# Altium PCB STM32F103-Breakout-Board.PcbDoc
Units mm, origin at the board's own origin, x right, y up, seen from the top; angles counter-clockwise.
Board outline 50 x 50 mm, 2 copper layers (Top Layer, Bottom Layer); 31 components, 22 nets, 131 pads, 175 vias.
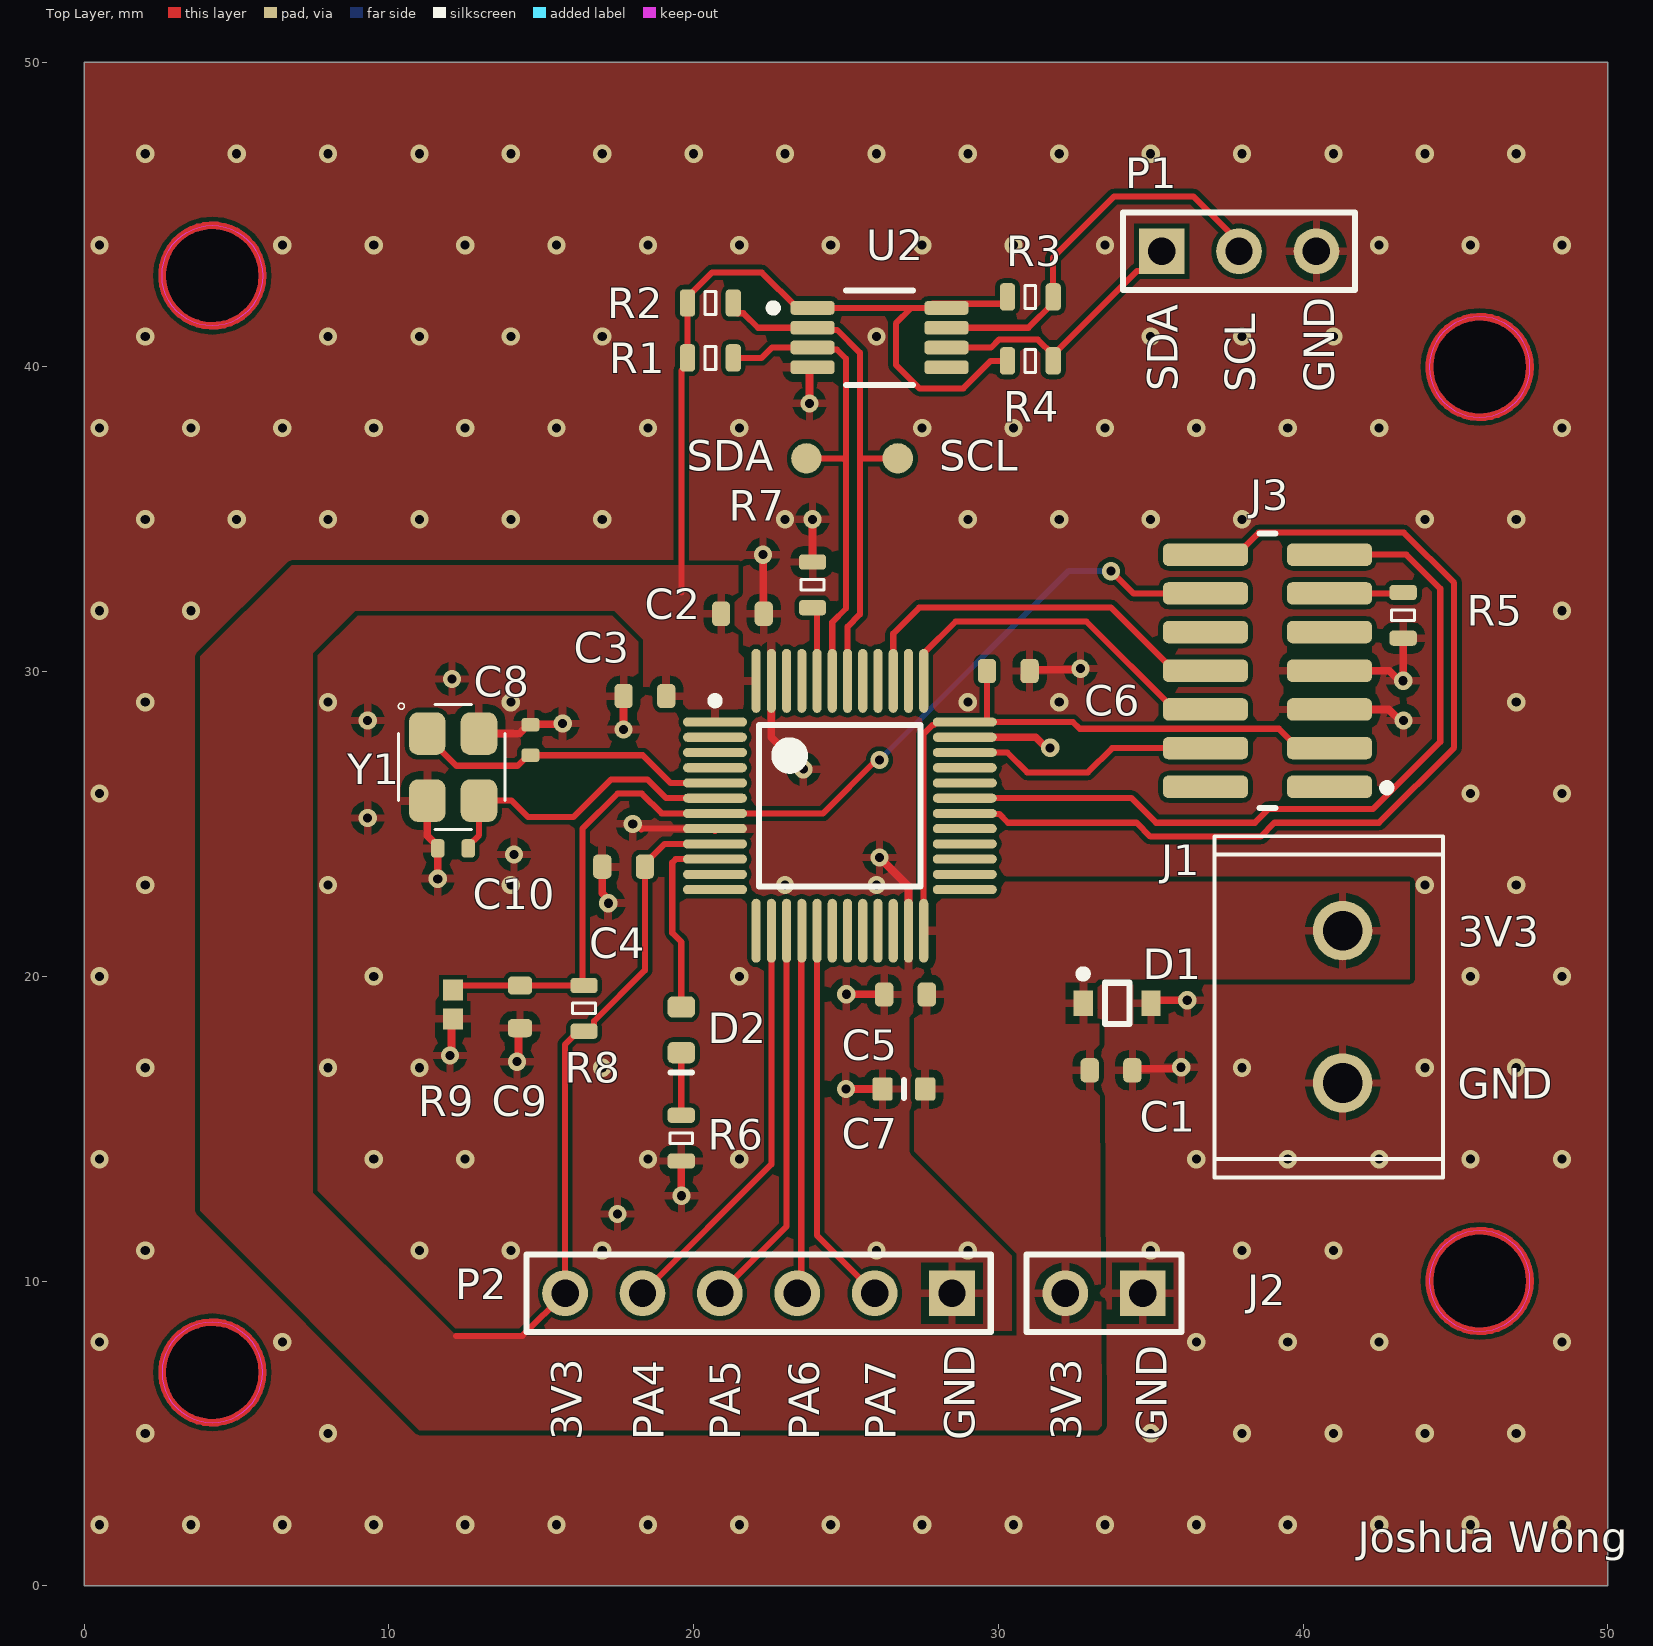
[diagram p0: Top Layer view]
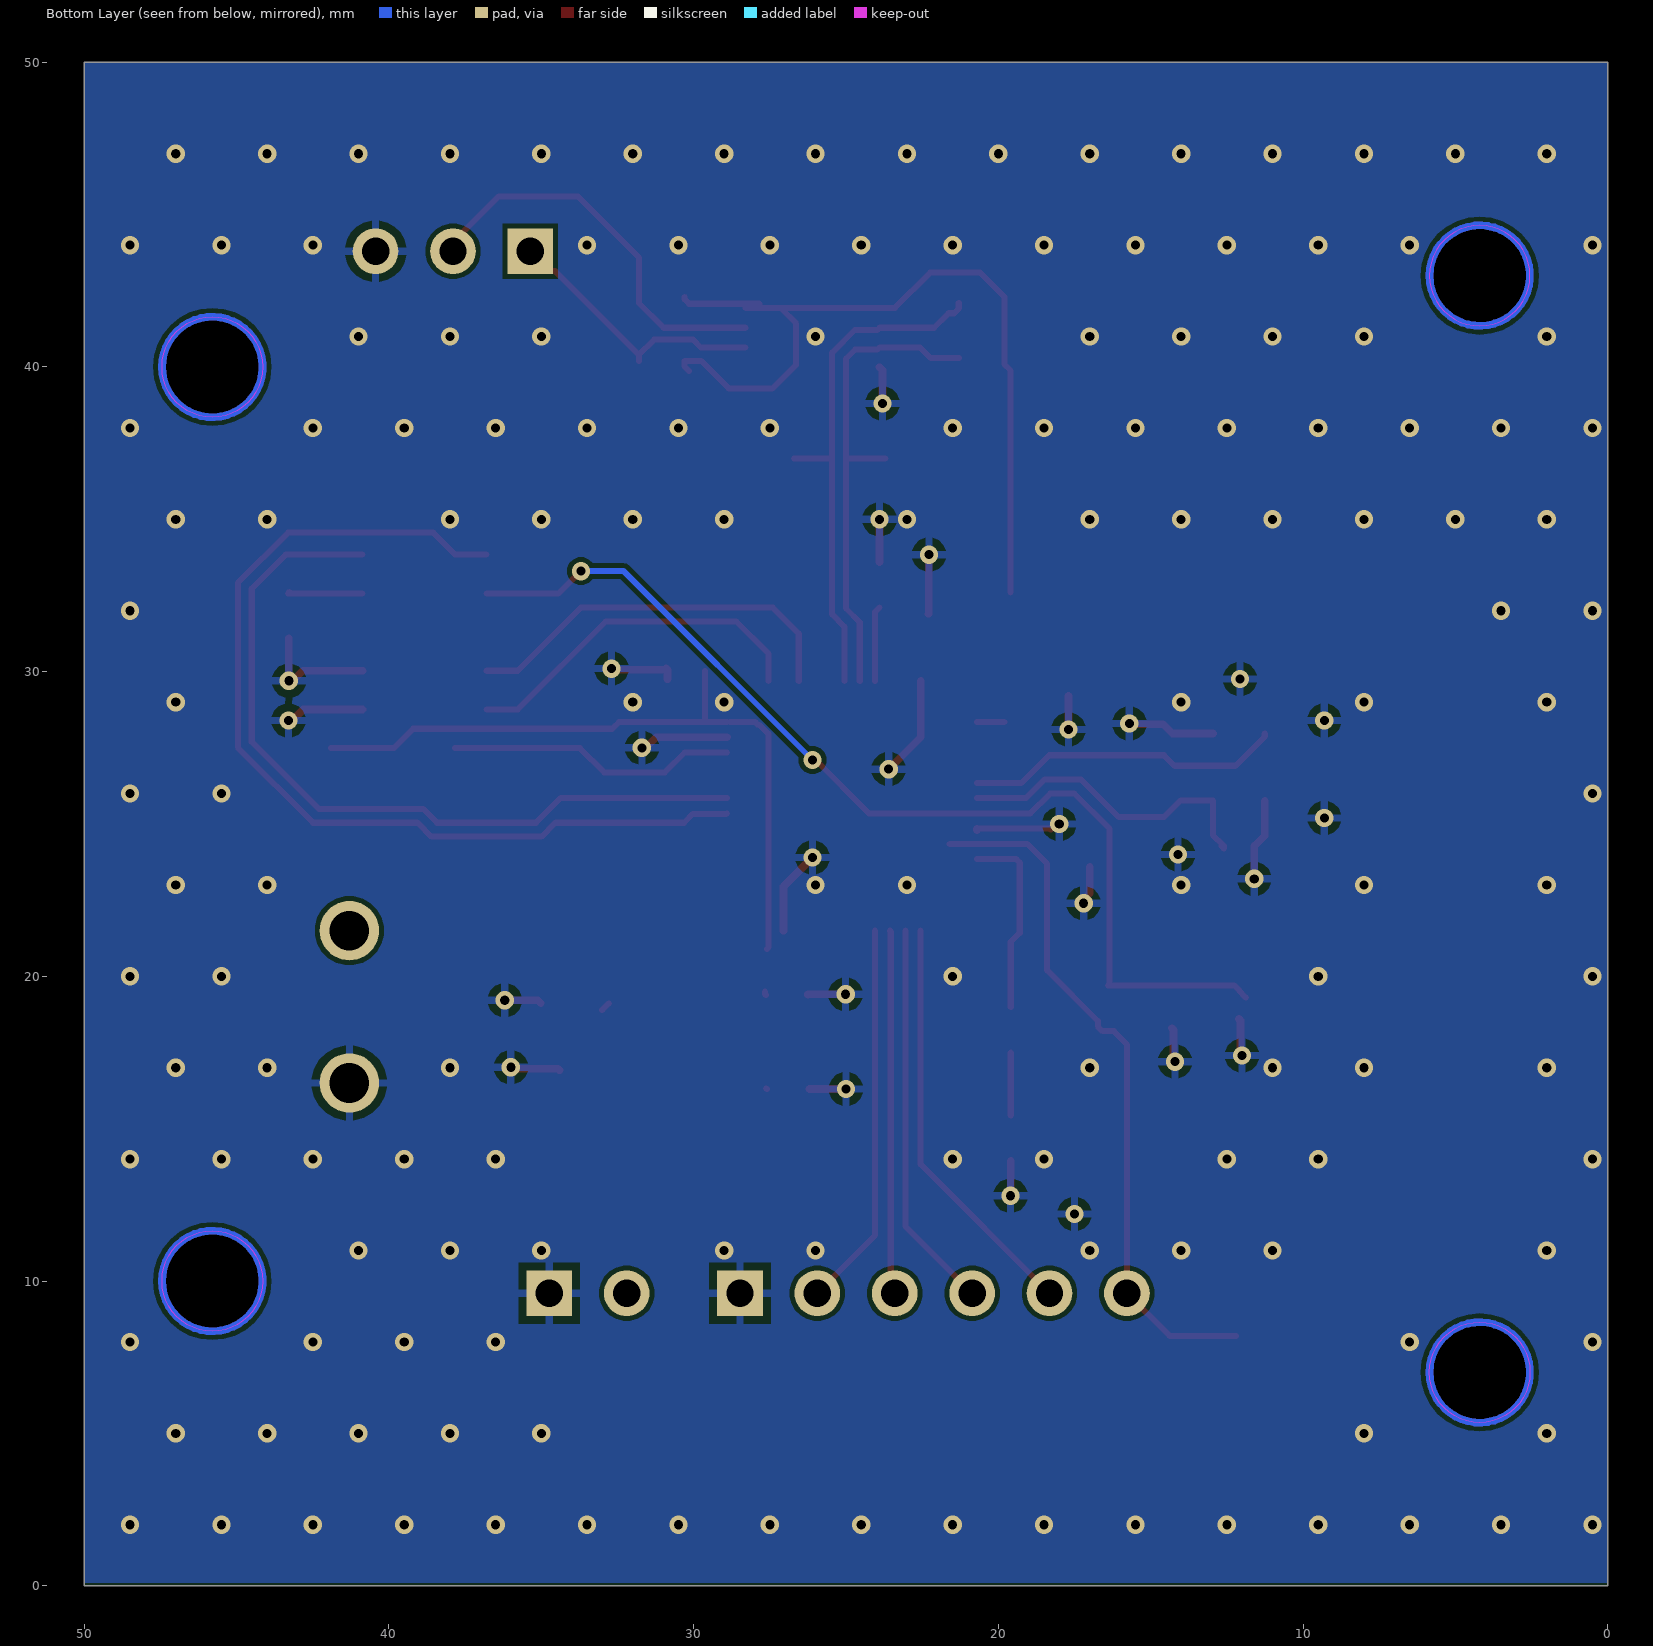
[diagram p1: Bottom Layer view, seen from below]
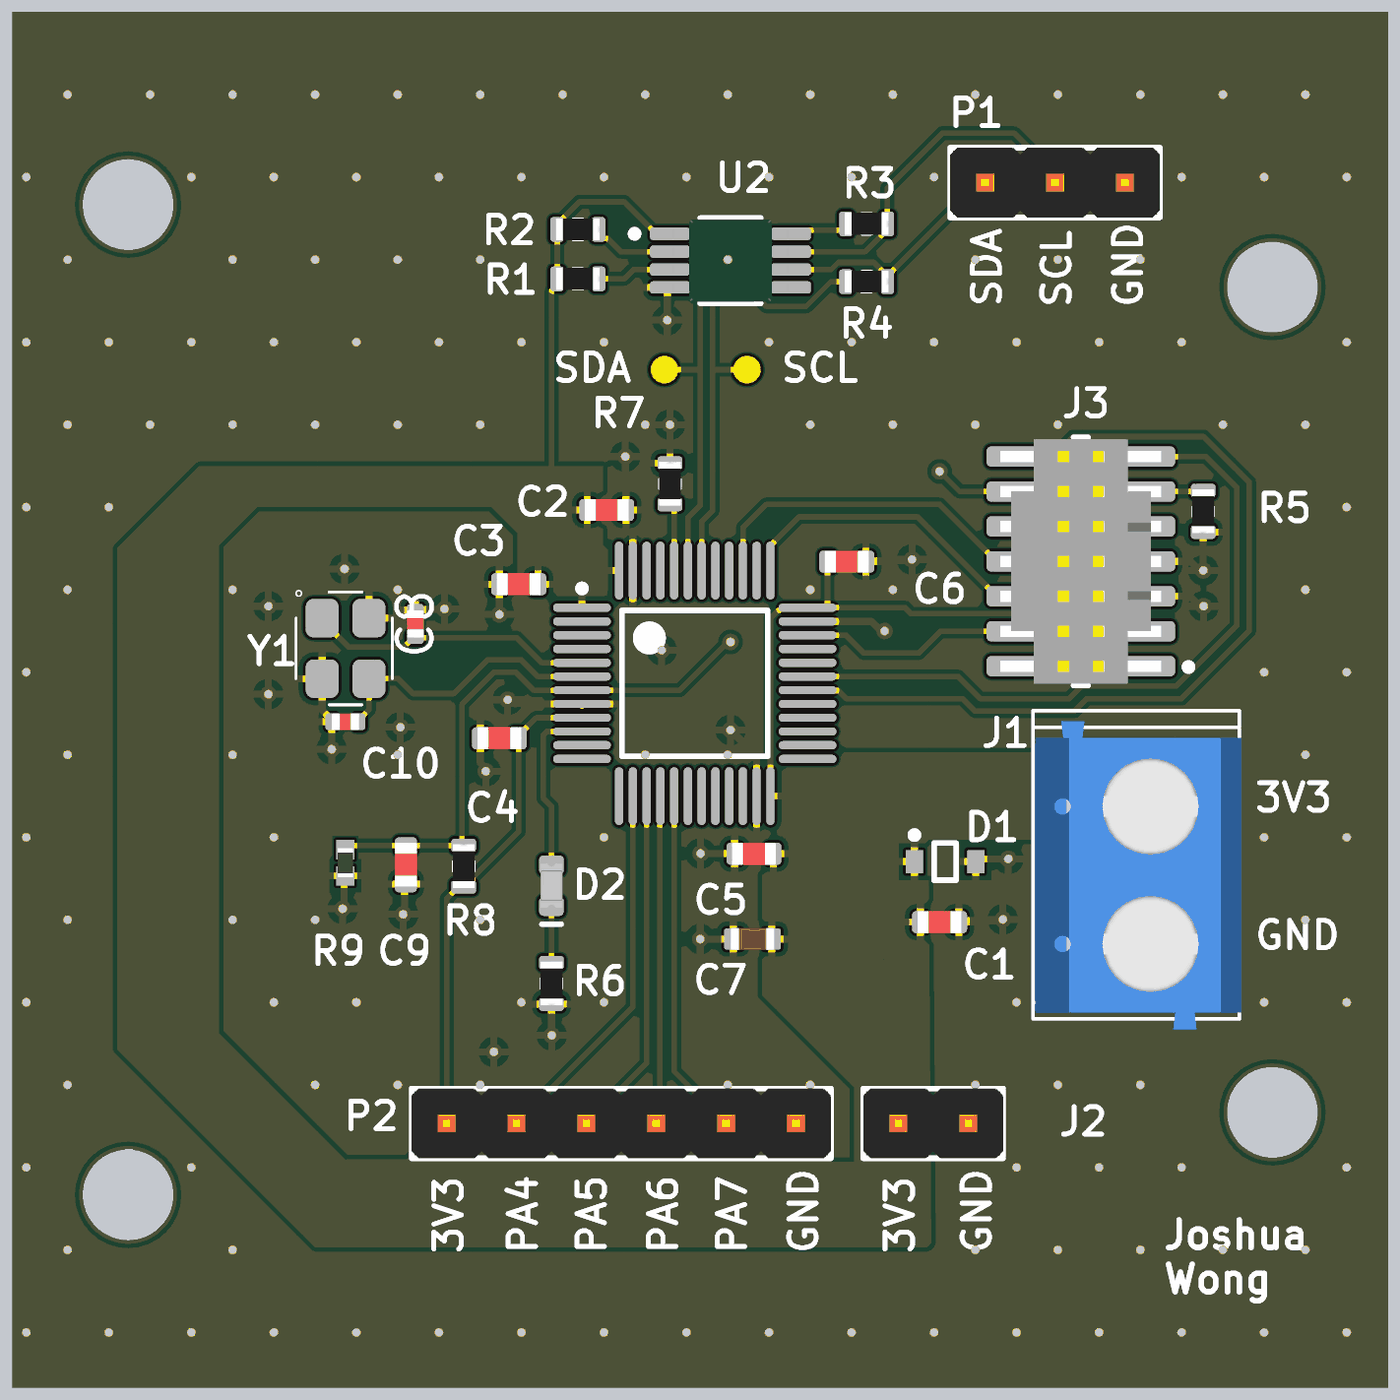
[diagram p2: 3D render of the assembled board from above, using the file's embedded part models]

## Layer stack, top to bottom
Top Solder: solder mask 0.0102, Solder Resist, Dk 3.5
Top Layer: signal copper 0.0356
Dielectric 1: dielectric 0.32, FR-4, Dk 4.8
Bottom Layer: signal copper 0.0356
Bottom Solder: solder mask 0.0102, Solder Resist, Dk 3.5

## Board outline
0,0 50,0 50,50 0,50
cut-out: 44.15,40 ccw(c45.8,40) 45.8,38.35 ccw(c45.8,40) 47.45,40 ccw(c45.8,40) 45.8,41.65 ccw(c45.8,40)
cut-out: 44.15,10 ccw(c45.8,10) 45.8,8.35 ccw(c45.8,10) 47.45,10 ccw(c45.8,10) 45.8,11.65 ccw(c45.8,10)
cut-out: 4.2,41.35 cw(c4.2,43) 2.55,43 cw(c4.2,43) 4.2,44.65 cw(c4.2,43) 5.85,43 cw(c4.2,43)
cut-out: 2.55,7 ccw(c4.2,7) 4.2,5.35 ccw(c4.2,7) 5.85,7 ccw(c4.2,7) 4.2,8.65 ccw(c4.2,7)

## Design rules (kind name [scope] priority, off if disabled: settings)
Clearance [All] p1: gap=0.15 ignorepadtopadclearanceinfootprint=FALSE
PolygonConnect [All] p1: connectstyle=Relief reliefconductorwidth=0.254 reliefentries=4 polygonreliefangle="90 Angle" airgapwidth=0.254
RoutingVias [All] p1: holewidth=0.711 width=1.27 viastyle="Through Hole" minholewidth=0.711 minwidth=1.27 maxholewidth=0.711 maxwidth=1.27
SolderMaskExpansion [All] p1: expansion=0.102 istentingtop=FALSE
SupplyNets "Schematic Supply Nets_1" [InNet('3V3')] p1: voltage=0.000
SupplyNets "Schematic Supply Nets" [InNet('GND')] p2: voltage=0.000
Width [All] p1: maxlimit=1.6 minlimit=0.2 preferedwidth=0.254
30 further rules are at their usual default settings.

## Components (designator, comment, footprint, x,y, rotation, side; value= is the part's Value field where it differs from the comment)
C1 "GCM188R71C105KA64J" CAP0603R 33.7,16.915 r180 top value=1µF
C2 "TMK107B7104KAHT" CAP0603R 21.6,31.9 r180 top value=100nF
C3 "TMK107B7104KAHT" CAP0603R 18.4,29.2 r0 top value=100nF
C4 "TMK107B7104KAHT" CAP0603R 17.7,23.6 r0 top value=100nF
C5 "TMK107B7104KAHT" CAP0603R 26.953,19.403 r0 top value=100nF
C6 "TMK107B7104KAHT" CAP0603R 30.327,30.02 r180 top value=100nF
C7 "Capacitor 4.7µF +/-20% 10V 0603" CAPC0603(1608)100_L 26.9,16.3 r0 top value=4.7µF
C8 "GJM1555C1H100JB01D" CAP0402R 14.645,27.756 r90 top value=10pF
C9 "TMK107B7104KAHT" CAP0603R 14.3,19 r90 top value=100nF
C10 "GJM1555C1H100JB01D" CAP0402R 12.1,24.2 r180 top value=10pF
D1 "SZMM3Z3V3T1G" ONSC-SOD-323-2-477-02_V 33.9,19.115 r0 top
D2 "SML-D12U1WT86" LED0603 19.593,18.243 r90 top
J1 "691102710002" CON2_SCREW_5.00MM_691102710002 41.3,19 r90 top
J2 "Header 2" HDR1X2 34.74,9.6 r180 top
J3 "FTSH-107-01-L-DV-K" FP-FTSH-107-01-L-DV-K-MFG 38.835,30.03 r90 top
P1 "Header 3" HDR1X3 35.36,43.8 r0 top
P2 "Header 6" HDR1X6 28.48,9.6 r180 top
R1 "CRCW06034K70FKEA" RES0603R 20.55,40.3 r180 top value=4.7k
R2 "CRCW06034K70FKEA" RES0603R 20.55,42.1 r180 top value=4.7k
R3 "CRCW06034K70FKEA" RES0603R 31.05,42.3 r180 top value=4.7k
R4 "CRCW06034K70FKEA" RES0603R 31.05,40.2 r180 top value=4.7k
R5 "ERJ-3GEYJ101V" RES0603R 43.286,31.85 r90 top value=100
R6 "CRCW06031K00FKTA" RES0603R 19.593,14.687 r90 top value=1k
R7 "ERA-3AEB103V" RES0603R 23.9,32.85 r270 top value=10k
R8 "ERA-3AEB103V" RES0603R 16.4,18.95 r270 top value=10k
R9 "Resistor 0R 0402 63 mW" RESC1005X40X25ML05T10 12.1,19.075 r90 top value=0
SCL "TPAD10R" TP10R 26.7,37 r90 top (schematic designator TP1)
SDA "TPAD10R" TP10R 23.7,37 r90 top (schematic designator TP2)
U1 "STM32F103C8T6" STM-LQFP48_M 24.8,25.597 r0 top
U2 "TCA9517DGKRQ1" FP-DGK0008A-MFG 26.099,40.964 r0 top
Y1 "X322516MLB4SI" X322516MLB4SI-Footprint-1 12.105,26.867 r270 top

## Footprints (in the part's own frame and the unit in brackets; to place one, negate y for a bottom-side part, rotate by r counter-clockwise, add the part's x,y. Pads: shape width x height; smd on the part's side, far side on the other; paste and mask are expansions set on the pad)
CAP0402R [mm] "Capacitor 0402 reflow soldering"
  rrect50% 0.45x0.6 smd: 1(-0.5,0) 2(0.5,0)
  body extent -0.5,-0.3 0.5,0.3, height 0.2
CAP0603R [mm] "capacitor 0603 reflow soldering"
  rrect50% 0.6x0.8 smd: 1(-0.7,0) 2(0.7,0)
  body extent -0.8,-0.4 0.8,0.4, height 0.3
CAPC0603(1608)100_L [mm] "Chip Capacitor, Body 1.6x0.8mm, Height 1.0mm, IPC High Density"
  rrect25% 0.66x0.76 smd: 1(-0.7,0) 2(0.7,0)
  silkscreen extent 0,-0.3 0,0.3, body extent -0.8,-0.4 0.8,0.4, height 0.95
CON2_SCREW_5.00MM_691102710002 [mm] "2-Pos Screw terminal 5mm pitch"
  round 1.95 hole 1.3: 1(-2.5,0) 2(2.5,0)
  silkscreen extent -5.6,-3.3 5.6,4.2, body extent -5.98,-3.37 5.22,4.13, height 10.03
FP-DGK0008A-MFG [mm]
  rrect50% 1.45x0.45 smd: 1(-2.2,0.975) 2(-2.2,0.325) 3(-2.2,-0.325) 4(-2.2,-0.975) 5(2.2,-0.975) 6(2.2,-0.325) 7(2.2,0.325) 8(2.2,0.975)
  silkscreen extent -3.61,-1.55 1.1,1.55, body extent -3.03,-1.8 3.03,1.8, height 0.25
FP-FTSH-107-01-L-DV-K-MFG [mm]
  rrect50% 0.74x2.79 smd: 1(-3.81,-2.035) 2(-3.81,2.035) 3(-2.54,-2.035) 4(-2.54,2.035) 5(-1.27,-2.035) 6(-1.27,2.035) 7(0,-2.035) 8(0,2.035) 9(1.27,-2.035) 10(1.27,2.035) 11(2.54,-2.035) 12(2.54,2.035) 13(3.81,-2.035) 14(3.81,2.035)
  silkscreen extent -4.51,-4.04 4.51,0.27, body extent -4.61,-3.53 4.61,3.53, height 0.25
HDR1X2 [mm] "Connector; Header; 2 Position"
  rect 1.5x1.5 hole 0.9: 1(0,0)
  round 1.5 hole 0.9: 2(2.54,0)
  silkscreen extent -1.27,-1.27 3.81,1.27, body extent -1.27,-1.27 3.81,1.27, height 8.89
HDR1X3 [mm] "Connector; Header; 3 Position"
  rect 1.5x1.5 hole 0.9: 1(0,0)
  round 1.5 hole 0.9: 2(2.54,0) 3(5.08,0)
  silkscreen extent -1.27,-1.27 6.35,1.27, body extent -1.27,-1.27 6.35,1.27, height 8.89
HDR1X6 [mm] "Connector; Header; 6 Position"
  rect 1.5x1.5 hole 0.9: 1(0,0)
  round 1.5 hole 0.9: 2(2.54,0) 3(5.08,0) 4(7.62,0) 5(10.16,0) 6(12.7,0)
  silkscreen extent -1.27,-1.27 13.97,1.27, body extent -1.27,-1.27 13.97,1.27, height 8.89
LED0603 [mm] "0603 LED footprint, thick line on the cathode"
  rrect50% 0.7x0.9 smd: 1(-0.75,0) 2(0.75,0)
  silkscreen extent -1.4,-0.35 -1.4,0.35, body extent -0.8,-0.4 0.8,0.4, height 0.34
ONSC-SOD-323-2-477-02_V [mm] "SOD, 2-Leads, Body 1.7x1.25mm"
  rect 0.63x0.83 smd: 1(-1.115,0) 2(1.115,0)
  silkscreen extent -1.24,-0.67 0.4,1.09, body extent -0.85,-0.63 0.85,0.63, height 1.06
RES0603R [mm] "resistor 0603 reflow soldering"
  rrect50% 0.5x0.9 smd: 1(-0.75,0) 2(0.75,0)
  silkscreen extent -0.18,-0.38 0.18,0.38, body extent -0.8,-0.4 0.8,0.4, height 0.45
RESC1005X40X25ML05T10 [mm] "Chip Resistor, 2-Leads, Body 1.05x0.55mm, IPC Low Density"
  rect 0.7x0.65 smd: 1(-0.475,0) 2(0.475,0)
  body extent -0.53,-0.28 0.53,0.28, height 0.4
STM-LQFP48_M [mm] "QFP, 48-Leads, Body 7x7mm, Pitch 0.5mm, IPC Low Density"
  oval 2.1x0.3 smd: 1(-4.1,2.75) 2(-4.1,2.25) 3(-4.1,1.75) 4(-4.1,1.25) 5(-4.1,0.75) 6(-4.1,0.25) 7(-4.1,-0.25) 8(-4.1,-0.75) 9(-4.1,-1.25) 10(-4.1,-1.75) 11(-4.1,-2.25) 12(-4.1,-2.75) 25(4.1,-2.75) 26(4.1,-2.25) 27(4.1,-1.75) 28(4.1,-1.25) 29(4.1,-0.75) 30(4.1,-0.25) 31(4.1,0.25) 32(4.1,0.75) 33(4.1,1.25) 34(4.1,1.75) 35(4.1,2.25) 36(4.1,2.75)
  oval 0.3x2.1 smd: 13(-2.75,-4.1) 14(-2.25,-4.1) 15(-1.75,-4.1) 16(-1.25,-4.1) 17(-0.75,-4.1) 18(-0.25,-4.1) 19(0.25,-4.1) 20(0.75,-4.1) 21(1.25,-4.1) 22(1.75,-4.1) 23(2.25,-4.1) 24(2.75,-4.1) 37(2.75,4.1) 38(2.25,4.1) 39(1.75,4.1) 40(1.25,4.1) 41(0.75,4.1) 42(0.25,4.1) 43(-0.25,4.1) 44(-0.75,4.1) 45(-1.25,4.1) 46(-1.75,4.1) 47(-2.25,4.1) 48(-2.75,4.1)
  silkscreen extent -4.22,-2.65 2.65,3.57, body extent -3.5,-3.5 3.5,3.5, height 1.6
TP10R [mm] "Testpoint, round, d=1.0mm"
  round 1 smd paste-1: 1(0,0)
X322516MLB4SI-Footprint-1 [mm]
  rrect50% 1.4x1.2 smd: 1(-1.1,-0.85) 2(1.1,-0.85) 3(1.1,0.85) 4(-1.1,0.85)
  silkscreen extent -2.1,-1.8 2.05,1.7, body extent -1.62,-1.25 1.63,1.25, height 0.7

## Part data
C1: library part CMP-024-000687-8, "CAP CER 1UF 16V X7R 0603", Case/Package="0603 (1608 Metric)", Manufacturer="Murata Electronics", Max Operating Temperature=125°C, Min Operating Temperature=-55°C, Rating=AEC-Q200, Supplier Part Number 1=490-12657-1-ND, Temperature Coefficient=X7R, Tolerance=10%, Voltage Rating=16V, ComponentLink1Description=Datasheet, ComponentLink1URL=https://www.murata.com/~/media/webrenewal/support/library/catalog/products/capacitor/mlcc/c03e.ashx?la=en-us, PN=GCM188R71C105KA64J, Supplier 1=Digi-Key
C2 C3 C4 C5 C6 C9: library part CMP-024-001300-8, "CAP CER 0.1UF 25V X7R 0603", Case/Package="0603 (1608 Metric)", Manufacturer="Taiyo Yuden", Max Operating Temperature=125°C, Min Operating Temperature=-55°C, Rating=AEC-Q200, Supplier Part Number 1=587-3468-1-ND, Temperature Coefficient=X7R, Tolerance=10%, Voltage Rating=25V, ComponentLink1Description=Datasheet, ComponentLink1URL=https://www.yuden.co.jp/productdata/catalog/mlcc_all_hq_e.pdf, PN=TMK107B7104KAHT, Supplier 1=Digi-Key
C7: library part CMP-001-00076-9, "Chip Capacitor, 4.7µF +/-20%, 10V, 0603, Thickness 1 mm", Case/Package="0603 (1608 Metric)", Max Operating Temperature=85°C, Min Operating Temperature=-55°C, Tolerance=10%, Voltage Rating=10V
C8 C10: library part CMP-024-000904-8, "CAP CER 10PF 50V C0G/NP0 0402", Case/Package="0402 (1005 Metric)", Manufacturer="Murata Electronics", Max Operating Temperature=125°C, Min Operating Temperature=-55°C, Rating=-, Supplier Part Number 1=490-3113-1-ND, Temperature Coefficient="C0G, NP0", Tolerance=5%, Voltage Rating=50V, ComponentLink1Description=Datasheet, ComponentLink1URL=https://search.murata.co.jp/Ceramy/image/img/A01X/G101/ENG/GJM1555C1H100JB01-01.pdf, PN=GJM1555C1H100JB01D, Supplier 1=Digi-Key
D1: library part CMP-004-00015-1, "Zener Diode, 3.3V V(Z), 6%, 0.3W, Silicon, Unidirectional", Max Operating Temperature=150°C, RoHS Compliant=Yes
D2: library part CMP-029-000028-3, "LED RED DIFFUSED 1608 SMD", Color=Red, Current - Average=20mA, Manufacturer="Rohm Semiconductor", Package="0603 (1608 Metric)", Supplier Part Number 1=SML-D12U1WT86CT-ND, Voltage - Forward Max=2.2V, ComponentLink1Description=Datasheet, ComponentLink1URL=https://d1d2qsbl8m0m72.cloudfront.net/en/products/databook/datasheet/opto/led/chip_mono/sml-d12x1-e.pdf, PN=SML-D12U1WT86, Supplier 1=Digi-Key, Type=LED
J1: library part CMP-027-000000-1, "2 Position Wire to Board Terminal Block Horizontal with Board 0.197\" (5.00mm) Through Hole", Manufacturer="Würth Elektronik", Supplier Part Number 1=732-2028-ND, ComponentLink1Description=Datasheet, ComponentLink1URL=https://www.we-online.de/katalog/datasheet/6911027100xx.pdf, Connector Type="Screw Terminal", Contact Type=Wire, Number of Positions=2, Number of Rows=1, Pitch - Mating="0.197\" (5.00mm)", PN=691102710002, Series="WR-TBL Series 102", Supplier 1=Digi-Key
J2: library part CMP-083-000070-4, "Header, 2-Pin", Component Type=Standard, Design Item ID="Header 2", LatestRevisionDate=17-Jul-2002, LatestRevisionNote="Re-released for DXP Platform.", Pin Count=2, Publisher="Altium Limited", Source="Miscellaneous Connectors.SchLib"
J3: library part CMP-002-00034-3, "Conn Unshrouded Header HDR 14 POS 1.27mm Solder ST Top Entry SMD TIGER CLAW™ Tube", Current Rating=3.4A, Max Operating Temperature=125°C, Min Operating Temperature=-55°C, Contact Material=Bronze, Gender=Male, Number of Contacts=14, Number of Rows=2, Pitch=1.27mm
P1: library part CMP-083-000090-3, "Header, 3-Pin", Component Type=Standard, Design Item ID="Header 3", LatestRevisionDate=17-Jul-2002, LatestRevisionNote="Re-released for DXP Platform.", Pin Count=3, Publisher="Altium Limited", Source="Miscellaneous Connectors.SchLib"
P2: library part CMP-083-000107-2, "Header, 6-Pin", Component Type=Standard, Design Item ID="Header 6", LatestRevisionDate=17-Jul-2002, LatestRevisionNote="Re-released for DXP Platform.", Pin Count=6, Publisher="Altium Limited", Source="Miscellaneous Connectors.SchLib"
R1 R2 R3 R4: library part CMP-054-001314-6, "RES SMD 4.7K OHM 1% 1/10W 0603", Case/Package="0603 (1608 Metric)", Manufacturer="Vishay Dale", Max Operating Temperature=155°C, Min Operating Temperature=-55°C, Power=100mW, Rating=AEC-Q200, Supplier Part Number 1=541-4.70KHCT-ND, Tolerance=1%, ComponentLink1Description=Datasheet, ComponentLink1URL=https://www.vishay.com/docs/20035/dcrcwe3.pdf, Composition="Thick Film", PN=CRCW06034K70FKEA, Supplier 1=Digi-Key
R5: library part CMP-054-002817-6, "RES SMD 100 OHM 5% 1/10W 0603", Case/Package="0603 (1608 Metric)", Manufacturer=Panasonic, Max Operating Temperature=155°C, Min Operating Temperature=-55°C, Power=100mW, Rating=AEC-Q200, Supplier Part Number 1=P100GCT-ND, Tolerance=5%, ComponentLink1Description=Datasheet, ComponentLink1URL=http://industrial.panasonic.com/www-cgi/jvcr13pz.cgi?E+PZ+3+AOA0001+ERJ3GEYJ101V+7+WW, Composition="Thick Film", PN=ERJ-3GEYJ101V, Supplier 1=Digi-Key
R6: library part CMP-054-000907-6, "RES SMD 1K OHM 1% 1/10W 0603", Case/Package="0603 (1608 Metric)", Manufacturer="Vishay Dale", Max Operating Temperature=155°C, Min Operating Temperature=-55°C, Power=100mW, Rating=AEC-Q200, Supplier Part Number 1=541-2987-1-ND, Tolerance=1%, ComponentLink1Description=Datasheet, ComponentLink1URL=https://www.vishay.com/docs/20008/dcrcw.pdf, Composition="Thick Film", PN=CRCW06031K00FKTA, Supplier 1=Digi-Key
R7 R8: library part CMP-054-002375-6, "RES SMD 10K OHM 0.1% 1/10W 0603", Case/Package="0603 (1608 Metric)", Manufacturer=Panasonic, Max Operating Temperature=155°C, Min Operating Temperature=-55°C, Power=100mW, Rating=AEC-Q200, Supplier Part Number 1=P10KDBCT-ND, Tolerance=0.1%, ComponentLink1Description=Datasheet, ComponentLink1URL=https://industrial.panasonic.com/cdbs/www-data/pdf/RDM0000/AOA0000C307.pdf, Composition="Thin Film", PN=ERA-3AEB103V, Supplier 1=Digi-Key
R9: library part CMP-009-00004-5, "Chip Resistor, 0 Ohm, 0.063 W, -55 to 155 degC, 0402 (1005 Metric)", Case/Package=0402, Max Operating Temperature=155°C, Min Operating Temperature=-55°C, Power=63mW, Voltage Rating=50V, Mounting Technology=SM, Pins=2, RoHS Compliant=True
SCL SDA: library part CMP-00028-00000-4, "1mm round", Pins=1
U1: library part CMP-00007-1, "RISC Microcontroller, 32-Bit, FLASH, STM32 CPU, 72MHz, CMOS, PQFP48", Case/Package=LFQFP, Clock Frequency=16MHz, Max Operating Temperature=105°C, Max Supply Current=50mA, Max Supply Voltage=3.6V, Min Operating Temperature=-40°C, Min Supply Voltage=2V, Nominal Supply Voltage=3.3V, Package Body Material=Plastic, Package Equivalence Code=QFP48,.35SQ,20, Package Shape=Square, Peak Reflow Temperature (Cel)=260°C, Power Supplies=2.5/3.3, Temperature Grade=INDUSTRIAL, Time @ Peak Reflow Temperature-Max (s)=30s, Height - Seated (Max)=1.6mm, Interface=I2C,SPI,USB,CAN,USART, JESD-30 Code=S-PQFP-G48, JESD-609 Code=e4, Length=7mm, Moisture Sensitivity Level=2, Number of I/O Lines=37, Peripherals=POR,DMA, Pins=48, Qualification Status="Not Qualified", Reach SVHC Compliant=Yes, RoHS Compliant=Yes, Surface Mount=Yes, Technology=CMOS, Terminal Finish=Nickel, Terminal Form="Gull Wing", Terminal Pitch=0.5mm, Terminal Position=QUAD, Width=7mm
U2: library part CMP-015-00008-5, "Voltage Level Translator Bidirectional 1 Circuit 2 Channel 8-VSSOP", Case/Package=VSSOP, Frequency=400kHz, Max Operating Temperature=125°C, Min Operating Temperature=-40°C, Channel Type=Bidirectional
Y1: library part CMP-003-00003-2, "16MHz Surface Mount Crystal 9pF ±10ppm ±20ppm SMD3225-4P Crystals ROHS", Frequency=16MHz

## Via types
v1: diameter 0.6, hole 0.3, Top Layer to Bottom Layer, tented both sides, 175 vias

## Nets (pads, with @x,y where several pads share a name; then routed paths per layer and width w, separated by ;. In a path a pad name is that pad's centre, name@x,y a point inside that pad or via, vN(x,y) a via of type N, cw(c..) or ccw(c..) an arc to the next point about the centre after c; other vN are vias at no path point)
3V3: C1.2 C2.2 C3.2 C4.2 C5.2 C6.2 C7.2 D1.1 J1.2 J2.2 J3.3 P2.6 R1.2 R2.2 R3.2 R4.2 R8.2 U1.1 U1.9 U1.24 U1.36 U1.48 U2.1 U2.8 | length 76.5
  Top Layer w0.2: 12.2,8.2 14.38,8.2 P2.6 ; P2.6@15.7,9.52 P2.6 ; 19.6,32.6 19.6,39.886 19.8,40.086 R1.2 R2.2 19.8,42.3 20.6,43.1 22.238,43.1 23.399,41.939 U2.1 U2.8 ; U1.1@19.8,28.347 U1.1 ; U1.9@21.6,24.347 U1.9 19.047,24.347 18.4,23.7 C4.2 18.4,20.2 16.735,18.535 16.735,18.348 16.586,18.2 R8.2 16.211,18.2 15.78,17.769 P2.6 ; 27.134,41.929 26.636,41.431 26.636,40.07 27.406,39.3 28.848,39.3 29.748,40.2 R4.2 30.3,40.014 R4.2@30.152,39.865 ; U1.24@27.596,20.9 27.55,20.946 U1.24 27.55,27.963 27.834,28.247 27.873,28.247 27.973,28.347 U1.36@28.8,28.347 ; C7.2 C7.2@27.62,16.32 ; C5.2@27.633,19.383 C5.2 C5.2@27.653,19.503 ; U2.8@27.847,42.075 30.152,42.075 30.3,42.223 R3.2 ; U1.36 U1.36@29.581,28.347 ; C6.2 29.627,28.393 U1.36@29.581,28.347 ; D1.1 D1.1@33,18.9 ; J3.3@41.895,27.49 J3.3 39.845,27.49 39.21,28.125 32.673,28.125 32.451,28.347 U1.36@29.581,28.347
GND: C1.1 C2.1 C3.1 C4.1 C5.1 C6.1 C7.1 C8.2 C9.1 C10.2 D1.2 J1.1 J2.1 J3.5 J3.7 P1.3 P2.1 R5.1 R6.1 R7.1 R9.1 U1.8 U1.23 U1.35 U1.47 U2.4 Y1.2 Y1.4 | length 42
  Top Layer w0.2: 18.277,24.847 U1.8
  Top Layer w0.254: Y1.2 11.255,24.62 11.6,24.275 C10.2 v1(11.6,23.2) ; v1(12,17.4) 12.05,17.45 12.05,18.55 R9.1 ; Y1.4 14.281,27.967 14.592,28.278 15.678,28.278 v1(15.7,28.3) ; v1(14.2,17.2) 14.25,17.25 14.25,18.25 C9.1 ; C4.1 17,22.724 17.2,22.524 v1(17.2,22.4) ; v1(17.7,28.1) C3.1 ; v1(18,25) 18.124,25 18.277,24.847 ; R6.1 19.597,13.934 19.597,12.803 v1(19.6,12.8) ; U1.8@20.7,24.8 U1.8 ; v1(22.276,33.841) 22.288,33.829 22.288,31.912 C2.1 ; U1.47 22.55,27.85 v1(23.6,26.8) ; v1(23.8,38.8) 23.8,39.891 U2.4@23.898,39.989 ; R7.1 v1(23.9,35) ; v1(25,16.3) C7.1 ; v1(25.013,19.41) 26.253,19.41 C5.1 ; v1(26.1,23.9) 27.05,22.95 U1.23 ; U1.35 31.229,27.847 31.576,27.5 v1(31.7,27.5) ; C6.1@30.862,29.755 30.862,30.062 30.9,30.1 30.94,30.06 32.66,30.06 v1(32.7,30.1) ; C1.1 34.45,16.965 35.95,16.965 v1(36,17.015) ; D1.2 35.115,19.215 v1(36.2,19.215) ; J3.5 42.816,28.76 43.176,28.4 v1(43.3,28.4) ; J3.7 42.833,30.03 43.163,29.7 v1(43.286,29.7) R5.1
  other v1: 0.5,2 3.5,2 6.5,2 9.5,2 12.5,2 15.5,2 18.5,2 21.5,2 24.5,2 27.5,2 30.5,2 33.5,2 36.5,2 39.5,2 42.5,2 45.5,2 48.5,2 2,5 8,5 35,5 38,5 41,5 44,5 47,5 0.5,8 6.5,8 36.5,8 39.5,8 42.5,8 48.5,8 2,11 11,11 14,11 17,11 26,11 29,11 35,11 38,11 41,11 17.5,12.2 0.5,14 9.5,14 12.5,14 18.5,14 21.5,14 36.5,14 39.5,14 42.5,14 45.5,14 48.5,14 2,17 8,17 11,17 17,17 38,17 44,17 47,17 0.5,20 9.5,20 21.5,20 45.5,20 48.5,20 2,23 8,23 14,23 23,23 26,23 44,23 47,23 14.1,24 9.3,25.2 0.5,26 45.5,26 48.5,26 9.3,28.4 2,29 8,29 14,29 29,29 32,29 47,29 12.069,29.756 0.5,32 3.5,32 48.5,32 2,35 5,35 8,35 11,35 14,35 17,35 23,35 29,35 32,35 35,35 38,35 44,35 47,35 0.5,38 3.5,38 6.5,38 9.5,38 12.5,38 15.5,38 18.5,38 21.5,38 27.5,38 30.5,38 33.5,38 36.5,38 39.5,38 42.5,38 48.5,38 2,41 8,41 11,41 14,41 17,41 26,41 35,41 38,41 41,41 0.5,44 6.5,44 9.5,44 12.5,44 15.5,44 18.5,44 21.5,44 24.5,44 27.5,44 30.5,44 33.5,44 42.5,44 45.5,44 48.5,44 2,47 5,47 8,47 11,47 14,47 17,47 20,47 23,47 26,47 29,47 32,47 35,47 38,47 41,47 44,47 47,47
MCU_SCL: R2.1 SCL.1 U1.42 U2.2 | length 17.1
  Top Layer w0.2: R2.1 21.3,41.914 21.448,41.765 21.635,41.765 22.111,41.289 U2.2 23.97,41.218 24.705,41.218 25.454,40.469 25.454,37 25.454,31.885 25.05,31.481 U1.42 ; 25.46,36.996 25.464,37 SCL.1
MCU_SDA: R1.1 SDA.1 U1.43 U2.3 | length 16.1
  Top Layer w0.2: R1.1 22.228,40.3 22.567,40.639 U2.3 23.97,40.568 24.705,40.568 25,40.273 25,36.9 ; SDA.1 24.9,37 25,36.9 ; U1.43 24.55,31.623 25,32.073 25,36.9
NetC8_1: C8.1 U1.5 Y1.1 | length 10.5
  Top Layer w0.2: Y1.1 11.255,27.867 12.209,26.913 14.22,26.913 14.563,27.256 C8.1 18.328,27.256 19.237,26.347 U1.5
NetC10_1: C10.1 U1.6 Y1.3 | length 10.6
  Top Layer w0.2: C10.1@12.678,24.278 C10.1 12.6,24.282 12.955,24.637 Y1.3 14.027,25.767 14.57,25.224 16.051,25.224 17.281,26.454 18.488,26.454 19.095,25.847 U1.6
NetD2_1: D2.1 R6.2 | length 2.1
  Top Layer w0.2: R6.2 D2.1
NetD2_2: D2.2 U1.10 | length 7.2
  Top Layer w0.2: D2.2 19.593,21.128 19.296,21.425 19.296,23.73 19.413,23.847 U1.10 U1.10@19.8,23.847
NetJ3_11: J3.11 R5.2 | length 2.5
  Top Layer w0.2: J3.11 R5.2@43.316,32.57 ; R5.2@43.266,32.62 R5.2
NetP2_2: P2.2 U1.17 | length 12.7
  Top Layer w0.2: U1.17 24.05,11.49 P2.2
NetP2_3: P2.3 U1.16 | length 12
  Top Layer w0.2: P2.3 23.531,9.731 23.531,21.478 U1.16
NetP2_4: P2.4 U1.15 | length 12.8
  Top Layer w0.2: P2.4 23.046,11.786 23.046,21.493 U1.15
NetP2_5: P2.5 U1.14 | length 13.6
  Top Layer w0.2: P2.5 22.55,13.83 U1.14
NetR7_2: R7.2 U1.44 | length 2.5
  Top Layer w0.2: R7.2 23.902,32.1 24.05,31.952 U1.44
NRST: C9.2 J3.12 R8.1 R9.2 U1.7 | length 34.7
  Top Layer w0.2: R9.2@11.875,19.304 12.1,19.529 R9.2 12.25,19.7 C9.2 R8.1 16.346,19.754 16.346,24.846 17.5,26 18.3,26 18.953,25.347 U1.7 24.247,25.347 26,27.1 v1(26.1,27.1) ; v1(33.7,33.3) 34.43,32.57 J3.12
  Bottom Layer w0.2: v1(26.1,27.1) 32.3,33.3 v1(33.7,33.3)
SWCLK: J3.6 U1.37 | length 11.8
  Top Layer w0.2: U1.37 27.55,30.597 28.6,31.647 32.888,31.647 35.775,28.76 J3.6
SWDIO: J3.4 U1.34 | length 9.5
  Top Layer w0.2: U1.34 30.297,27.347 30.949,26.694 32.941,26.694 33.737,27.49 J3.4 J3.4@37.825,27.49
SWO: J3.8 U1.39 | length 13
  Top Layer w0.2: U1.39 26.55,31.25 27.401,32.101 33.704,32.101 35.775,30.03 J3.8
TARGET_SCL: P1.2 R3.1 U2.7 | length 13.2
  Top Layer w0.2: U2.7 30.989,41.289 31.8,42.1 R3.1 31.8,43.6 33.8,45.6 36.4,45.6 37.9,44.1 P1.2
TARGET_SDA: P1.1 R4.1 U2.6 | length 9
  Top Layer w0.2: U2.6 29.759,40.639 30.02,40.9 31.3,40.9 R4.1@31.8,40.4 ; R4.1 R4.1@31.8,40.4 ; P1.1 34.71,43.15 34.55,43.15 R4.1@31.8,40.4
USART_MCU_RX: J3.13 U1.31 | length 26.2
  Top Layer w0.2: U1.31 34.374,25.847 35.179,25.042 38.421,25.042 38.875,25.496 42.303,25.496 44.504,27.697 44.504,32.723 43.387,33.84 J3.13
USART_MCU_TX: J3.14 U1.30 | length 32.1
  Top Layer w0.2: U1.30 28.917,25.33 30.03,25.33 30.318,25.042 34.537,25.042 34.991,24.588 38.609,24.588 39.063,25.042 42.491,25.042 44.958,27.509 44.958,32.911 43.305,34.564 38.549,34.564 37.825,33.84 J3.14
pads on no net: J3.1 J3.2 J3.9 J3.10 U1.2 U1.3 U1.4 U1.11 U1.12 U1.13 U1.18 U1.19 U1.20 U1.21 U1.22 U1.25 U1.26 U1.27 U1.28 U1.29 U1.32 U1.33 U1.38 U1.40 U1.41 U1.45 U1.46 U2.5

## Polygon pours and split planes (outlines as drawn)
GND on Top Layer "GND_L01_P005" (solid, remove dead copper, pour order 5): 0,0 0,50 50,50 50,0
3V3 on Top Layer "3V3_L01_P004" (solid, remove dead copper, pour order 4): 27.24,23.1 27.24,14.26 30.6,10.9 30.6,8.2 12.2,8.2 7.5,12.9 7.5,14.9 7.5,30.6 8.9,32 17.4,32 18.346,31.054 18.346,28.3 22.05,28.3 22.05,30.05 21.465,30.635 21.465,33.5 6.8,33.5 3.8,30.5 3.8,12.3 11,5.1 33.4,5.1 33.301,19.901 43.5,19.901 43.5,23.1
GND on Bottom Layer "GND_L02_P000" (solid, pour order 0): 0,0.1 0,50 50,50 50,0.1

## Other copper
Multi-Layer:
  circle w0.254: c45.8,10 r1.65
  circle w0.254: c45.8,40 r1.65
  circle w0.254: c4.2,43 r1.65
  circle w0.254: c4.2,7 r1.65

## Silkscreen, mask and mechanical layers (free items; w line width, h text height)
Top Overlay:
  text "SDA" at 35.891,39.201 h1 r90
  text "SCL" at 38.425,39.175 h1 r90
  text "GND" at 41.025,39.175 h1 r90
  text "3V3" at 45.075,20.975 h1
  text "GND" at 45.075,15.975 h1
  text "3V3" at 16.325,4.775 h1 r90
  text "PA4" at 19.025,4.775 h1 r90
  text "PA5" at 21.525,4.775 h1 r90
  text "PA6" at 24.125,4.775 h1 r90
  text "PA7" at 26.625,4.775 h1 r90
  text "GND" at 29.225,4.775 h1 r90
  text "3V3" at 32.725,4.775 h1 r90
  text "GND" at 35.525,4.775 h1 r90
  text "Joshua Wong" at 41.8,1.1 h1

## Text inside footprints (layer, text, board x,y; h text height)
J1: Mechanical 4 "1" at 43.95,15.35 h1 r90; Mechanical 4 "1" at 43.95,15.35 h1 r90